# Altium PCB PCBUL.PcbDoc (part 2 of 2)
Units mil, origin at the board's own origin, x right, y up, seen from the top; angles counter-clockwise.
Board outline 2874.31 x 3937.01 mil, 2 copper layers (Top Layer, Bottom Layer); 201 components, 228 nets, 805 pads, 341 vias.
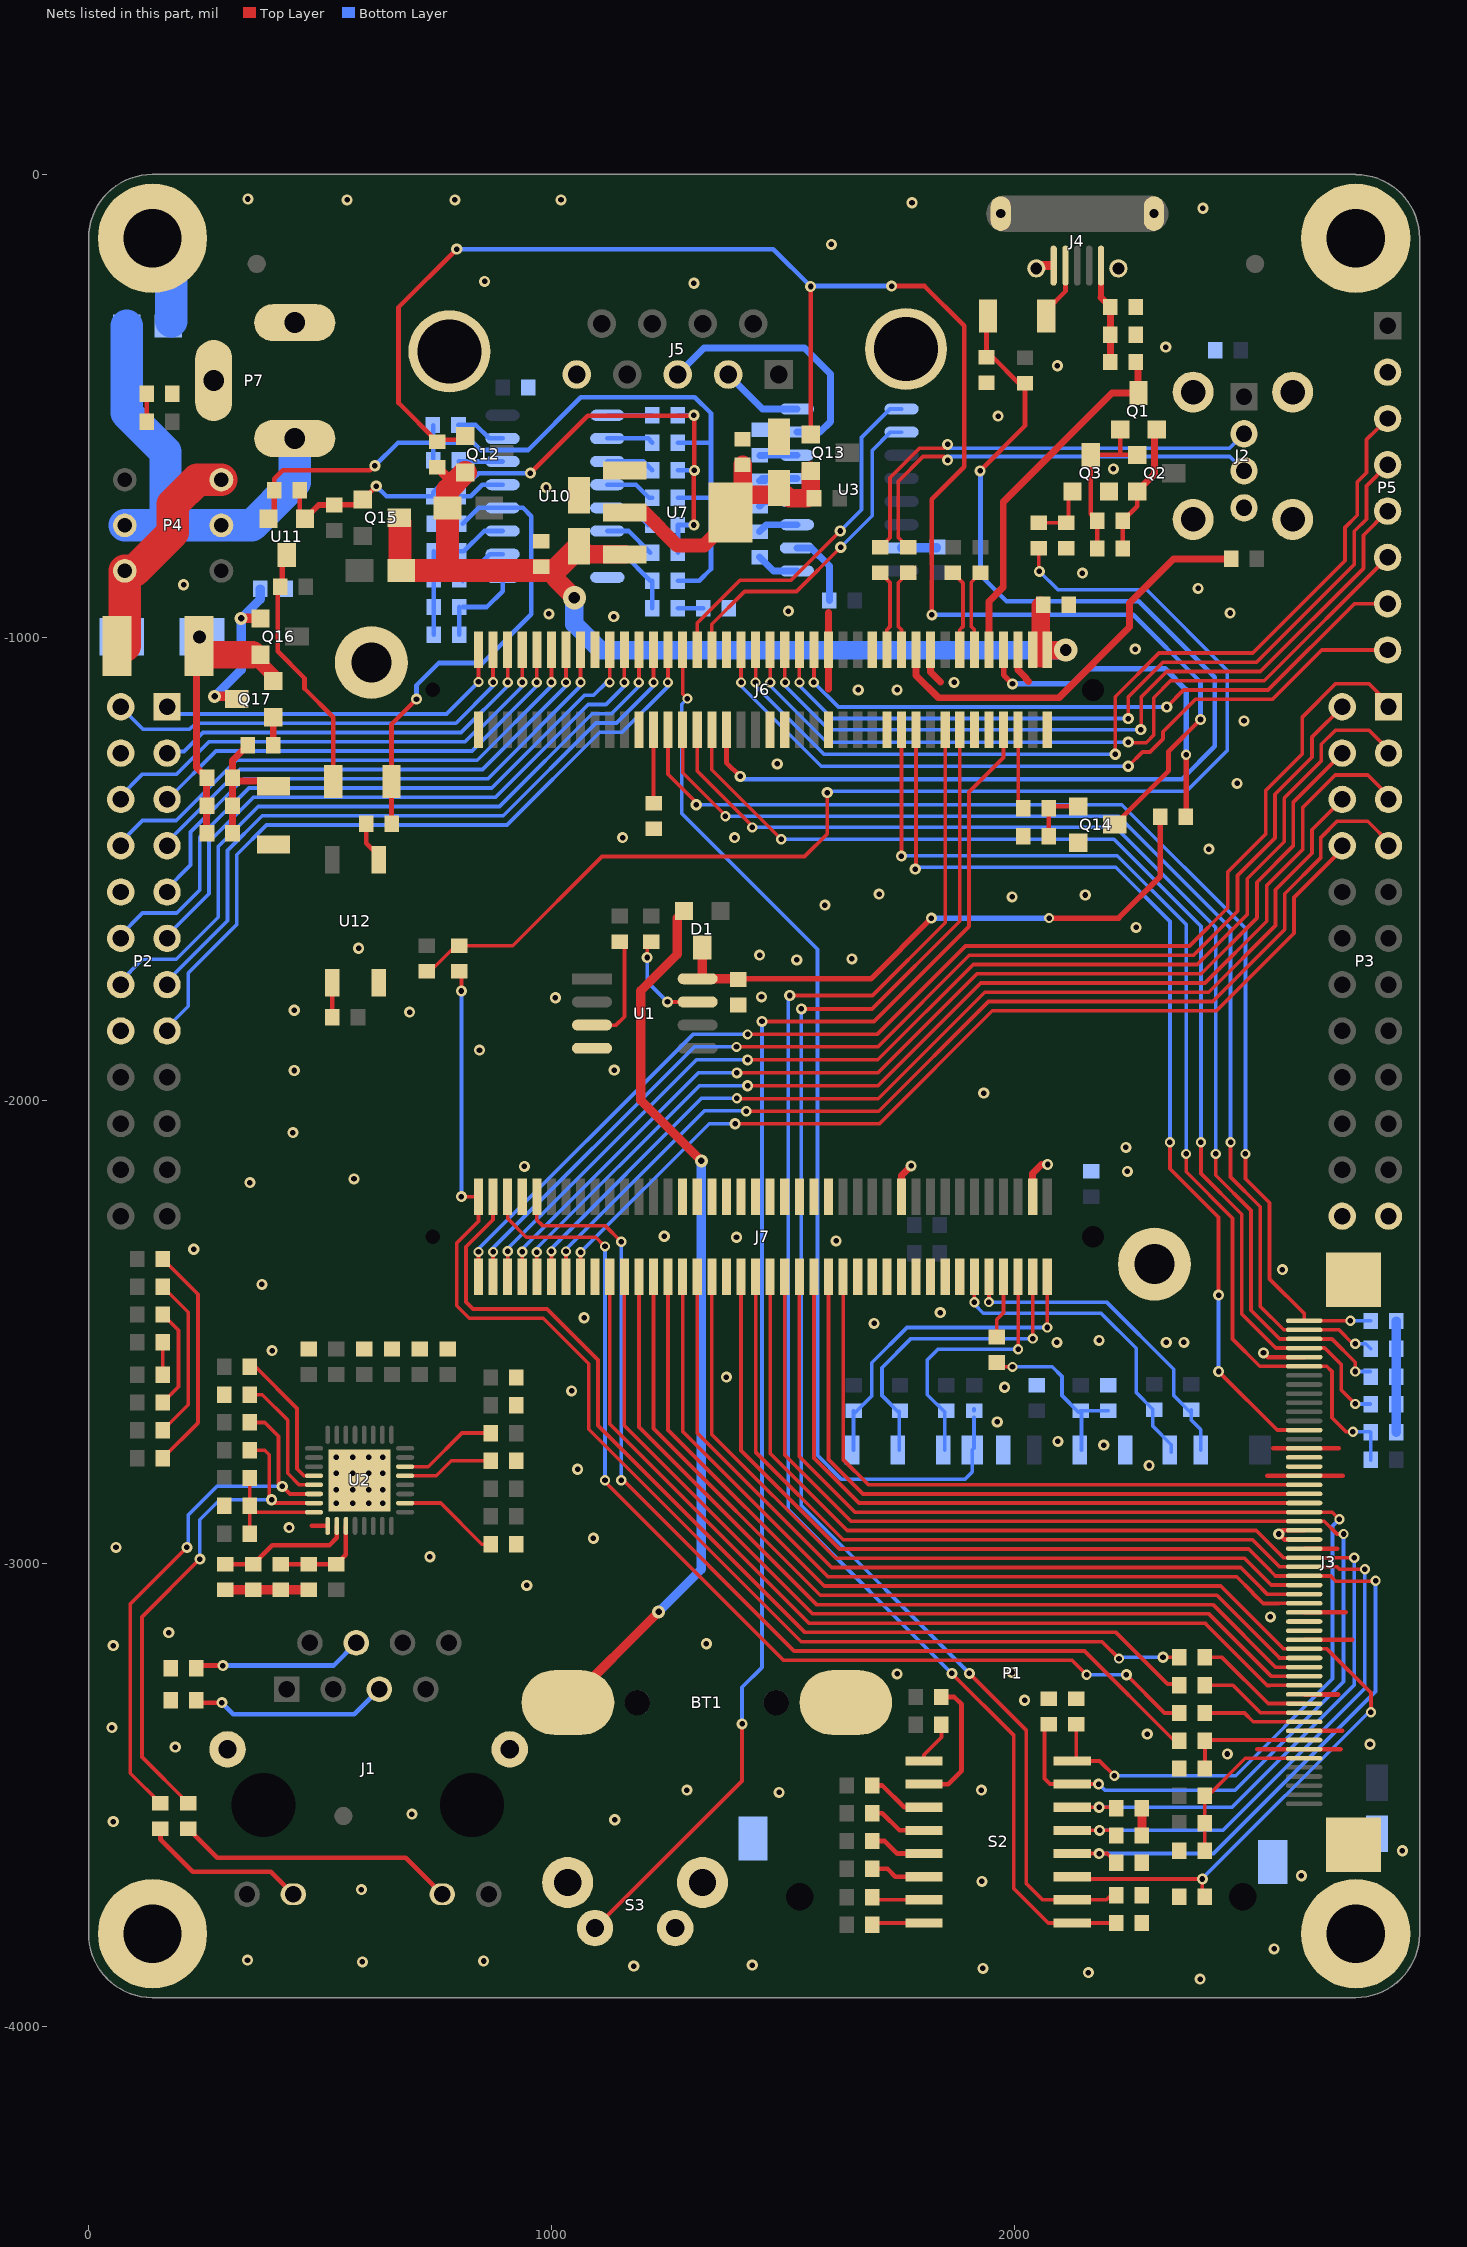
[diagram p2: the nets of this part, all layers, seen from the top]

## Via types
v1: diameter 24, hole 12, Top Layer to Bottom Layer, 235 vias
v2: diameter 22, hole 12, Top Layer to Bottom Layer, 74 vias
v3: diameter 25.98, hole 11.81, Top Layer to Bottom Layer, 16 vias
v4: diameter 50, hole 25, Top Layer to Bottom Layer, 8 vias
v5: diameter 28, hole 14, Top Layer to Bottom Layer, 4 vias
v6: diameter 40, hole 20, Top Layer to Bottom Layer, 2 vias
v7: diameter 30, hole 15, Top Layer to Bottom Layer, 1 vias
v8: diameter 50, hole 28, Top Layer to Bottom Layer, 1 vias

## Nets (pads, with @x,y where several pads share a name; then routed paths per layer and width w, separated by ;. In a path a pad name is that pad's centre, name@x,y a point inside that pad or via, vN(x,y) a via of type N, cw(c..) or ccw(c..) an arc to the next point about the centre after c; other vN are vias at no path point) (continued)
GND: BT1.2 C1.1 C2.1 C3.1 C4.1 C5.1 C6.1 C7.1 C8.2 C9.2 C10.2 C11.1 C12.1 C13.1 C14.1 C15.1 C17.1 C18.1 C19.2 C22.2 C24.2 C25.2 C26.2 C27.2 C28.1 C29.2 C47.2 C49.1 C50.2 C51.2 C59.1 D14.2 D15.1 D16.1 D17.2 H1.0 H2.0 H3.0 H10.1 H11.1 J1.13 J1.14 J2.4 J2.5 J2.6 J2.7 J2.8 J3.5 J3.15 J3.16 J3.17 J3.18 J3.24 J3.25 J3.26 J3.33 J3.34 J3.35 J3.36 J3.42 J3.46 J3.48 J3.55 J3.56 J4.5 J4.6 J4.7 J4.8 J4.9 J5.5 J5.10 J5.11 J6.2 J6.17 J6.24 J6.35 J6.42 J6.49 J6.55 J6.58 J6.63 J6.75 J6.80 J7.7 J7.18 J7.29 J7.36 J7.54 J7.59 J7.77 P1.3 P1.6 P1.12 P1.13 P2.4 P2.10 P2.16 P3.23 P3.24 P5.2 P7.2 P7.3 Q3.2 Q14.2 R7.1 R12.2 R14.1 R17.2 R18.1 R20.2 R21.1 R22.2 R23.1 R26.1 R30.2 R36.1 R51.1 R88.2 R89.2 R92.2 R93.2 R96.1 R97.1 R102.1 R133.2 R142.2 R148.2 R149.2 S3.2 S3.3 S3.4 U1.4 U2.1 U2.33 U3.15 U7.1 U10.8 U12.2 | length 2191.9
  Top Layer w10: 481.57,-2918.43 U2.1@516.1,-2918.43 ; 2523.69,-3400.54 J3.48@2624.91,-3400.54 2703.46,-3400.54 ; v1(2537,-2545) 2546.09,-2554.09 J3.5@2624.91,-2554.09 ; 2544.99,-2809.99 J3.18@2624.91,-2809.99 2708.01,-2809.99 ; 2558.06,-2750.94 J3.15@2624.91,-2750.94 2699.94,-2750.94 ; v1(2570,-2936) 2581.79,-2947.79 J3.25@2624.91,-2947.79 ; v1@2577.9,-2928.1 J3.24@2624.91,-2928.1 ; J3.46@2624.91,-3361.17 2706.83,-3361.17 ; J3.42@2624.91,-3282.43 2698.57,-3282.43 ; J3.36@2624.91,-3164.32 2728.68,-3164.32 ; J3.33@2624.91,-3105.27 2714.73,-3105.27 ; J3.26@2624.91,-2967.47 2696.31,-2967.47
  Top Layer w15: 1597.73,-1111.73 J6.49@1597.73,-1026.39 1597.73,-945.73 ; J7.59@1755.21,-2207.49 1755.21,-2161.79 v1(1776,-2141) ; J6.63@1818.2,-1026.39 1818.2,-1074.2 1840,-1096 ; J6.75@2007.18,-1026.39 2007.18,-1070.46 2024.5,-1087.78 2024.5,-1089.5 2030,-1095 ; J7.77@2038.68,-2207.49 2038.68,-2157.32 2058,-2138
  Top Layer w20: C3.1@295,-3056.56 C4.1@355,-3056.56 C2.1@415,-3056.56 C1.1@475,-3056.56 ; J4.7@2052.32,-196.85 2076,-196.85 ; R89.2@2274.56,-3587 R93.2@2274.56,-3528
  Bottom Layer w20: U3.15@1755.4,-806.4 C22.2@1831.04,-806.4 ; R26.1@2823.96,-2716 C15.1@2823.96,-2656 C14.1@2823.96,-2596 C13.1@2823.96,-2536 C12.1@2823.96,-2476
  other v1: 2400,-3897 2159,-3883 1931,-3874 1177,-3869 1433,-3867 591,-3860 853,-3858 343,-3856 2560,-3832 589,-3704 1929,-3686 2619,-3674 2837,-3620 53,-3557 1136,-3553 698,-3541 1491,-3494 1292,-3489 1928,-3489 2459,-3411 187,-3396 2767,-3390 2286,-3368 50,-3354 2021,-3295 1746,-3238 1994,-3235 53,-3177 1334,-3173 173,-3149 2552,-3115 946,-3047 737,-2985 59,-2965 1090,-2945 433,-2922 1056,-2796 2290,-2788 2192,-2744 2093,-2736 1962,-2694 1043,-2627 1978,-2619 1377,-2597 396,-2540 2091,-2522 2327,-2522 2365,-2522 2182,-2518 1696,-2481 1070,-2469 1839,-2458 374,-2397 2578,-2365 227,-2321 1614,-2303 1399,-2295 1243,-2293 348,-2177 573,-2169 2243,-2153 941,-2142 2071,-2138 2240,-2101 441,-2069 1933,-1984 444,-1935 1135,-1934 844,-1891 693,-1809 444,-1805 1008,-1778 1453,-1776 1529,-1696 1648,-1694 1449,-1686 583,-1671 2262,-1626 1590,-1578 1994,-1560 2152,-1556 1707,-1554 2419,-1457 1153,-1432 1395,-1432 2480,-1315 1487,-1273 2495,-1180 1662,-1113 1746,-1113 1869,-1097 2260,-1025 1134,-955 994,-949 2465,-947 1511,-943 2396,-894 205,-886 2146,-861 988,-676 2213,-636 1964,-522 2092,-413 2326,-373 1307,-235 855,-231 1604,-151 2406,-73 1778,-61 558,-55 791,-55 1020,-55 344,-53
  other v3: 535,-2870 570,-2870 605,-2870 635,-2870 535,-2840 570,-2840 605,-2840 635,-2840 535,-2805 570,-2805 605,-2805 635,-2805 535,-2770 570,-2770 605,-2770 635,-2770
GPIO_1: C15.2 J3.4 J6.34 | length 2546.6
  Top Layer w8: J6.34@1345.76,-1199.61 1345.76,-1285.76 v2(1495.5,-1435.5) ; v2(2402,-2090) 2402,-2157.58 2490,-2245.58 2490,-2461.05 2563.36,-2534.4 J3.4@2624.91,-2534.4 2669.4,-2534.4 2705,-2570 2705,-2625 v2(2735,-2655)
  Bottom Layer w8: v2(1495.5,-1435.5) 2213.92,-1435.5 2402,-1623.58 v2(2402,-2090) ; v2(2735,-2655) C15.2@2767.84,-2655
GPIO_2: C14.2 J3.3 J6.32 | length 2531.7
  Top Layer w8: J6.32@1314.27,-1199.61 1314.27,-1288.27 v2@1434.5,-1408.5 ; v2(2434,-2115) 2434,-2161.29 2510,-2237.29 2510,-2452.76 2571.96,-2514.72 J3.3@2624.91,-2514.72 2684.72,-2514.72 2735,-2565 v2(2735,-2585)
  Bottom Layer w8: v2(1433,-1410) 2218,-1410 2434,-1626 v2(2434,-2115) ; v2(2735,-2585) C14.2@2767.84,-2585
GPIO_3: C13.2 J3.2 J6.30 | length 2528.6
  Top Layer w8: J6.30@1282.77,-1199.61 1282.77,-1291.77 v2@1371.5,-1380.5 ; v2(2466,-2090) 2466,-2165.01 2530,-2229.01 2530,-2444.48 2580.55,-2495.03 J3.2@2624.91,-2495.03 2700.03,-2495.03 2730,-2525 v2(2735,-2525)
  Bottom Layer w8: v2(1375,-1386) 2224,-1386 2466,-1628 v2(2466,-2090) ; v2(2735,-2525) 2757.84,-2525 C13.2@2768.84,-2536
GPIO_4: C12.2 J3.1 J6.28 | length 2521.3
  Top Layer w8: J6.28@1251.28,-1199.61 1251.28,-1295.28 v1@1312,-1356 ; v2(2498,-2115) 2498,-2168.73 2550,-2220.73 2550,-2385 2624.91,-2459.91 J3.1@2624.91,-2475.35 v2(2724.65,-2475.35)
  Bottom Layer w8: v1(1312,-1361) 2231,-1361 2498,-1628 v2(2498,-2115) ; v2(2724.65,-2475.35) C12.2@2768.19,-2475.35
JTAG_MOD: J6.37 P5.8 | length 1659
  Top Layer w8: v2@1408.76,-1096.76 J6.37@1408.76,-1026.39 ; v1(2245,-1278) 2276,-1247 2291.88,-1247 2320,-1218.88 2320,-1203.44 2390,-1133.44 2556.56,-1133.44 2663,-1027 P5.8@2805,-1027
  Bottom Layer w8: v2(1409,-1097) 1409,-1105 1582,-1278 v1(2245,-1278)
JTAG_NTRST: J6.39 P5.3 | length 1970.1
  Top Layer w8: v2@1440.25,-1096.75 J6.39@1440.25,-1026.39 ; v1(2217,-1252) 2217,-1128 2311.56,-1033.44 2513.71,-1033.44 2713,-834.15 2713,-762.43 2739.36,-736.07 2739.36,-664.36 2759.36,-644.36 2759.36,-572.64 2782,-550
  Bottom Layer w8: v2(1440,-1097) 1440,-1104 1588,-1252 v1(2217,-1252)
JTAG_TCK: J6.41 P5.6 | length 1674.3
  Top Layer w8: v2@1471.75,-1096.75 J6.41@1471.75,-1026.39 ; v1(2245,-1226) 2246,-1227 2283.6,-1227 2300,-1210.6 2300,-1129.85 2336.41,-1093.44 2538.56,-1093.44 P5.6@2805,-827
  Bottom Layer w8: v2(1472,-1097) 1472,-1104 1594,-1226 v1(2245,-1226)
JTAG_TDI: J6.45 P5.4 | length 1715.6
  Top Layer w8: J6.45@1534.74,-1026.39 1534.74,-1096.74 v2(1535,-1097) ; v1(2245,-1175) 2245,-1128.28 2319.84,-1053.44 2521.99,-1053.44 2733,-842.43 2733,-770.72 2759.36,-744.36 2759.36,-672.64 P5.4@2805,-627
  Bottom Layer w8: v2(1535,-1097) 1535,-1104.18 1605.82,-1175 v1(2245,-1175)
JTAG_TDO: J6.47 P5.7 | length 1424
  Top Layer w8: v2(1566,-1097) 1566.24,-1096.76 J6.47@1566.24,-1026.39 ; v1(2328,-1150) 2364.56,-1113.44 2546.84,-1113.44 2733.28,-927 P5.7@2805,-927
  Bottom Layer w8: v2(1566,-1097) 1619,-1150 v1(2328,-1150)
JTAG_TMS: J6.43 P5.5 | length 1695.5
  Top Layer w8: v2@1503.24,-1096.24 J6.43@1503.24,-1026.39 ; v1(2272,-1199) 2273,-1198 2273,-1128.57 2328.13,-1073.44 2530.27,-1073.44 2753,-850.72 2753,-779 P5.5@2805,-727
  Bottom Layer w8: v2(1504,-1097) 1504,-1104.18 1598.82,-1199 v1(2272,-1199)
LCD_DATA0: J3.19 J7.52 | length 1412.6
  Top Layer w8: J7.52@1629.23,-2380.72 1629.23,-2775 1683.91,-2829.68 J3.19@2624.91,-2829.68
LCD_DATA1: J3.20 J7.50 | length 1452.3
  Top Layer w8: J7.50@1597.73,-2380.72 1597.73,-2775 1672.09,-2849.36 J3.20@2624.91,-2849.36
LCD_DATA2: J3.21 J7.48 | length 1490
  Top Layer w8: J7.48@1566.24,-2380.72 1566.24,-2771.79 1663.5,-2869.05 J3.21@2624.91,-2869.05
LCD_DATA3: J3.22 J7.46 R88.1 S2.16 | length 2695.1
  Top Layer w8: J7.46@1534.74,-2380.72 1534.74,-2768.58 1654.9,-2888.73 J3.22@2624.91,-2888.73 2685.73,-2888.73 v2(2701,-2904) ; R88.1@2133,-3346.56 2133,-3425 2132,-3426 2183,-3426 v2(2215,-3458)
  Bottom Layer w8: v2(2215,-3458) 2477,-3458 2686.27,-3248.73 2686.27,-2918.73 v2(2701,-2904)
LCD_DATA4: J3.23 J7.44 R92.1 S2.15 | length 2855.5
  Top Layer w8: J7.44@1503.24,-2380.72 1503.24,-2765.36 1646.3,-2908.42 J3.23@2624.91,-2908.42 2668,-2908.42 2695.58,-2936 v2(2710,-2936) ; R92.1@2073,-3346.56 2064,-3355.56 2064,-3464 2076,-3476 S2.15@2124,-3476 v1(2181,-3476)
  Bottom Layer w8: v1(2181,-3476) 2194,-3489 2476,-3489 2710,-3255 v2(2710,-2936)
LCD_DATA5: J3.27 J7.42 R93.1 S2.14 | length 2766.7
  Top Layer w8: J7.42@1471.75,-2380.72 1471.75,-2762.15 1638.01,-2928.42 2521.57,-2928.42 2580.31,-2987.16 J3.27@2624.91,-2987.16 v2(2733,-2987.16) ; S2.14@2124,-3526 v1(2182,-3526) R93.1@2217.44,-3526
  Bottom Layer w8: v1(2182,-3526) 2469,-3526 2733,-3262 v2@2733,-2985
LCD_DATA6: J3.28 J7.40 R89.1 S2.13 | length 2855.8
  Top Layer w8: J7.40@1440.25,-2380.72 1440.25,-2758.94 1629.73,-2948.42 2513.29,-2948.42 2571.4,-3006.53 ; S2.13@2124,-3576 v1(2183,-3576) 2208.44,-3576 R89.1@2219.44,-3587 ; 2571.4,-3006.84 J3.28@2624.91,-3006.84 2695.84,-3006.84 2701,-3012 v2(2756,-3012)
  Bottom Layer w8: v1(2183,-3576) 2449,-3576 2756,-3269 v2(2756,-3012)
LCD_DATA7: J3.29 J7.38 R149.1 S2.12 | length 2949.3
  Top Layer w8: J7.38@1408.76,-2380.72 1408.76,-2755.73 1621.44,-2968.42 2505.01,-2968.42 2551.4,-3014.81 2551.4,-3015.13 2562.49,-3026.21 ; S2.12@2124,-3626 v1(2182,-3626) 2199.44,-3626 R149.1@2219.44,-3646 ; 2562.49,-3026.53 J3.29@2624.91,-3026.53 2681.53,-3026.53 2693,-3038 2778,-3038 v2(2779,-3037)
  Bottom Layer w8: v1(2182,-3626) 2429,-3626 2779,-3276 v2@2779,-3035
LCD_DATA8: J3.30 J7.34 | length 1754
  Top Layer w8: J7.34@1345.76,-2380.72 1345.76,-2721.02 1613.16,-2988.42 2496.09,-2988.42 2553.57,-3045.9 ; 2553.57,-3046.21 J3.30@2624.91,-3046.21
LCD_DATA9: J3.31 J7.32 | length 1792
  Top Layer w8: J7.32@1314.27,-2380.72 1314.27,-2717.81 1604.88,-3008.42 2487.81,-3008.42 2533.57,-3054.18 2533.57,-3054.5 2544.66,-3065.58 ; 2544.66,-3065.9 J3.31@2624.91,-3065.9
LCD_DATA10: J3.32 J7.30 | length 1830.2
  Top Layer w8: J7.30@1282.77,-2380.72 1282.77,-2714.6 1596.59,-3028.42 2479.52,-3028.42 2513.57,-3062.47 2513.57,-3063.1 2536.37,-3085.9 2570,-3085.9 ; 2570,-3085.58 J3.32@2624.91,-3085.58
LCD_DATA11: J3.37 J7.28 R148.1 S2.11 | length 2983.8
  Top Layer w8: J7.28@1251.28,-2380.72 1251.28,-2711.39 1588.31,-3048.42 2444.96,-3048.42 2580.24,-3183.69 ; S2.11@2124,-3676 2129,-3681 v1(2405,-3681) R148.1@2405,-3720.44 ; S2.11@2129,-3676 S2.11@2153,-3676 ; 2580.24,-3184.01 J3.37@2624.91,-3184.01 2674.01,-3184.01 2769,-3279 v2(2769,-3321)
  Bottom Layer w8: v1@2404.5,-3680.5 v2@2766.5,-3318.5
LCD_DATA12: J3.38 J7.26 | length 1937.7
  Top Layer w8: J7.26@1219.78,-2380.72 1219.78,-2708.17 1580.02,-3068.42 2436.36,-3068.42 2571.33,-3203.38 ; 2571.33,-3203.69 J3.38@2624.91,-3203.69
LCD_DATA13: J3.39 J7.24 | length 1975.5
  Top Layer w8: J7.24@1188.28,-2380.72 1188.28,-2704.96 1571.74,-3088.42 2427.77,-3088.42 2562.41,-3223.06 ; 2562.41,-3223.38 J3.39@2624.91,-3223.38
LCD_DATA14: J3.40 J7.22 | length 2013.2
  Top Layer w8: J7.22@1156.79,-2380.72 1156.79,-2701.75 1563.45,-3108.42 2419.17,-3108.42 2553.5,-3242.75 ; 2553.5,-3243.06 J3.40@2624.91,-3243.06
LCD_DATA15: J3.41 J7.20 | length 2051.5
  Top Layer w8: J7.20@1125.29,-2380.72 1125.29,-2698.54 1555.17,-3128.42 2410.88,-3128.42 2411.83,-3129.36 2411.83,-3129.68 2545.21,-3263.06 2550,-3263.06 ; 2550,-3262.75 J3.41@2624.91,-3262.75
LCD_DATA16: J7.16 P3.8 | length 2115.4
  Top Layer w8: J7.16@1062.3,-2380.72 v2(1062.3,-2327.7) ; v1(1396,-2050) 1707.58,-2050 1951.52,-1806.06 2435.52,-1806.06 2603,-1638.58 2603,-1561.42 2708.65,-1455.76 P3.8@2708.65,-1446.06
  Bottom Layer w8: v2(1062.3,-2327.7) 1340,-2050 v1(1396,-2050)
LCD_DATA17: J7.14 P3.7 | length 2315.5
  Top Layer w8: J7.14@1030.8,-2380.72 v2(1030.8,-2325.8) ; v2(1420,-2023) 1706.29,-2023 1943.23,-1786.06 2427.23,-1786.06 2583,-1630.29 2583,-1553.13 2661,-1475.13 2661,-1431.7 2695.7,-1397 2761.96,-1397 P3.7@2811.02,-1446.06
  Bottom Layer w8: v2(1030.8,-2325.8) 1030.8,-2321.01 1329.82,-2022 v2@1420,-2022 ; v2@1419,-2022 v2(1420,-2023)
LCD_DATA18: J7.12 P3.6 | length 2253.1
  Top Layer w8: J7.12@999.31,-2380.72 v2(999.31,-2325.69) ; v2@1400,-1996 1705.01,-1996 1934.95,-1766.06 2418.95,-1766.06 2563,-1622.01 2563,-1544.85 2642,-1465.85 2642,-1415.09 P3.6@2711.02,-1346.06 ; v2(1400,-1995) v2@1401,-1996
  Bottom Layer w8: v2(999.31,-2325.69) 999.31,-2319.12 1323.42,-1995 v2(1400,-1995)
LCD_DATA19: J7.10 P3.5 | length 2446.8
  Top Layer w8: J7.10@967.81,-2380.72 v2(967.81,-2327.19) ; v1(1423,-1968) 1704.73,-1968 1926.66,-1746.06 2410.66,-1746.06 2544,-1612.73 2544,-1535.56 2622,-1457.56 2622,-1367 2692,-1297 2761.96,-1297 P3.5@2811.02,-1346.06
  Bottom Layer w8: v2(967.81,-2327.19) 967.81,-2319.01 1318.82,-1968 v1(1423,-1968)
LCD_DATA20: J7.8 P3.4 | length 2380.3
  Top Layer w8: J7.8@936.32,-2380.72 v2(936.32,-2326.32) ; v1(1400,-1940) 1704.44,-1940 1918.38,-1726.06 2402.38,-1726.06 2523,-1605.44 2523,-1528.28 2601,-1450.28 2601,-1356.09 P3.4@2711.02,-1246.06
  Bottom Layer w8: v2(936.32,-2326.32) 936.32,-2320.5 1316.82,-1940 v1(1400,-1940)
LCD_DATA21: J7.6 P3.3 | length 2571.2
  Top Layer w8: J7.6@904.82,-2380.72 v2(904.82,-2325.18) ; v1(1423,-1912) 1704.16,-1912 1910.09,-1706.06 2394.1,-1706.06 2502,-1598.16 2502,-1521 2582,-1441 2582,-1346.8 2662,-1266.8 2662,-1230.7 2692.17,-1200.54 2765.5,-1200.54 P3.3@2811.02,-1246.06
  Bottom Layer w8: v2(904.82,-2325.18) 904.82,-2319.63 1312.45,-1912 v1(1423,-1912)
LCD_DATA22: J7.4 P3.2 | length 2516.1
  Top Layer w8: J7.4@873.32,-2380.72 v2(873.32,-2326.68) v2@875,-2325 ; v2(1399,-1884) 1703.87,-1884 1901.81,-1686.06 2385.81,-1686.06 2481,-1590.87 2481,-1513.71 2562,-1432.71 2562,-1338.52 2642,-1258.52 2642,-1215.09 P3.2@2711.02,-1146.06
  Bottom Layer w8: v2@875,-2325 v2(873.32,-2326.68) 873.32,-2318.49 1307.82,-1884 v2(1399,-1884)
LCD_DATA23: J7.2 P3.1 | length 2701.3
  Top Layer w8: J7.2@841.83,-2380.72 v2(841.83,-2326.83) ; v2(1423,-1857) 1702.59,-1857 1893.53,-1666.06 2377.53,-1666.06 2460,-1583.59 2460,-1506.43 2542,-1424.43 2542,-1330.23 2621,-1251.23 2621,-1171.7 2692.7,-1100 2764.96,-1100 P3.1@2811.02,-1146.06
  Bottom Layer w8: v2(841.83,-2326.83) 841.83,-2319.99 1304.82,-1857 v2(1423,-1857)
LCD_DE: J7.5 R47.1 | length 2237.8
  Top Layer w8: J7.5@904.82,-2207.49 904.82,-2254.82 945,-2295 1095,-2295 v2(1115,-2315) ; v2(1115,-2820) 1115,-2823.18 1500.23,-3208.42 2123.42,-3208.42 v2(2155,-3240) ; v1(2241,-3240) 2323.4,-3322.4 R47.1@2355.44,-3322.4
  Bottom Layer w8: v2(1115,-2820) v2(1115,-2315) ; v2(2155,-3240) v1(2241,-3240)
LCD_HSYNC: J7.1 R45.1 R103.2 | length 2743.4
  Top Layer w8: R103.2@800,-1720.88 805,-1725.88 v1(805,-1763.32) ; v1(805,-2207.49) J7.1@841.83,-2207.49 841.83,-2260.36 794.83,-2307.36 794.83,-2443.11 821.72,-2470 981.72,-2470 1080,-2568.28 1080,-2709.81 1538.6,-3168.42 2188.42,-3168.42 v2(2225,-3205) ; v1(2320,-3202) R45.1@2355.04,-3202
  Bottom Layer w8: v1(805,-2207.49) v1(805,-1763.32) ; v2@2220,-3210 v2(2225,-3205) ; v2@2228,-3202 v1(2320,-3202)
LCD_NPWREN: J3.6 J6.60 R25.2 R26.2 | length 2384.7
  Top Layer w8: v1(1755.21,-1472) J6.60@1755.21,-1199.61 ; v2(2370,-2115) 2370,-2153.86 2470,-2253.86 2470,-2515 2528.77,-2573.77 J3.6@2624.91,-2573.77 2673.77,-2573.77 2685,-2585 2685,-2685 2715,-2715 v2(2730,-2715)
  Bottom Layer w8: v1@1755.14,-1471.14 2221.28,-1471.14 2370,-1619.86 v2(2370,-2115) ; v2(2730,-2715) R26.2@2767.84,-2715 ; R25.2@2768.84,-2776 R26.2@2768.84,-2716
LCD_PCLK: J7.9 R48.1 | length 2205.5
  Top Layer w8: J7.9@967.81,-2207.49 967.81,-2257.81 980,-2270 1115,-2270 v2(1150,-2305) ; v2(1150,-2820) 1155,-2820 1523.42,-3188.42 2150.42,-3188.42 2344.4,-3382.4 R48.1@2355.44,-3382.4
  Bottom Layer w8: v2(1150,-2820) v2(1150,-2305)
LCD_VSYNC: J7.3 R46.1 | length 2214.5
  Top Layer w8: J7.3@873.32,-2207.49 873.32,-2257.15 814.83,-2315.64 814.83,-2389.02 815,-2389.19 815,-2435 830,-2450 990,-2450 1100,-2560 1100,-2701.53 1546.89,-3148.42 2218.42,-3148.42 2330,-3260 R46.1@2353.04,-3260
LED0_LINK: R6.2 R10.1 U2.30 | length 1199.1
  Top Layer w8: R10.1@155,-3517.44 90,-3452.44 90,-3087 v1(212,-2965) ; R6.2@347.56,-2695 380,-2695 410,-2725 410,-2826 417,-2833 v1(418,-2833) 434.53,-2849.53 U2.30@486.57,-2849.53
  Bottom Layer w8: v1(212,-2965) 215,-2962 215,-2895 277,-2833 v1(418,-2833) v1@423,-2838
LED1_SPEED: R5.2 R11.1 U2.31 | length 1118.7
  Top Layer w8: R11.1@215,-3517.44 115,-3417.44 115,-3115 v1(240,-2990) ; R5.2@347.56,-2755 380,-2755 390,-2765 390,-2857 v1(395,-2862) 402.21,-2869.21 U2.31@486.57,-2869.21
  Bottom Layer w8: v1(240,-2990) 240,-2905 283,-2862 v1(395,-2862)
MODE0: J6.68 R97.2 S2.10 | length 3141.2
  Top Layer w8: v1(1539,-1802) 1691.88,-1802 1881.2,-1612.69 J6.68@1881.2,-1199.61 ; v1(1902,-3237) 2025,-3360 2025,-3691 2060,-3726 S2.10@2124,-3726 2198,-3726 R97.2@2219,-3705
  Bottom Layer w8: v1(1539,-1802) 1539,-2874 v1(1902,-3237)
MODE1: J6.66 R96.2 S2.9 | length 3205.2
  Top Layer w8: v1(1514,-1773) 1692.6,-1773 1849.7,-1615.9 J6.66@1849.7,-1199.61 ; v1(1864,-3237) 1998,-3371 1998,-3702 2072,-3776 S2.9@2124,-3776 2208,-3776 R96.2@2219,-3765
  Bottom Layer w8: v1(1514,-1773) 1511,-1776 1511,-2884 v1(1864,-3237)
MX6_POR_B: J6.74 S3.1 | length 3101.6
  Top Layer w8: S3.1@1093.39,-3786.89 1411,-3469.28 v1(1411,-3346) ; v1@1449,-1829 v1(1454,-1829) 1696,-1829 1901.2,-1623.8 1901.2,-1333.49 1975.68,-1259 J6.74@1975.68,-1199.61
  Bottom Layer w8: v1(1411,-3346) 1411,-3267 1454,-3224 1454,-1834 v1@1449,-1829
NAND_ALE: J7.60
NAND_CLE: J7.62
NAND_DATA0: J7.45
NAND_DATA1: J7.43
NAND_DATA2: J7.41
NAND_DATA3: J7.39
NAND_DATA4: J7.37
NAND_DATA5: J7.35
NAND_DATA6: J7.33
NAND_DATA7: J7.31
NAND_DQS: J7.56
NAND_NCE0: J7.66
NAND_NCE1: J7.64
NAND_NRE: J7.49
NAND_NREADY: J7.68
NAND_NWE: J7.47
NAND_NWP: J7.58
NetBT1_1: BT1.1 D1.2 | length 1921.5
  Top Layer w20: BT1.1@1035,-3300 v5(1231,-3104) ; D1.2@1285.63,-1590.82 1271,-1605.45 1271,-1684 1192,-1763 1192,-1999 v5(1323,-2130)
  Bottom Layer w20: v5(1231,-3104) 1323,-3012 v5(1323,-2130)
NetC1_2: C1.2 C2.2 FB1.1 U2.3 | length 211.5
  Top Layer w10: C2.2@415,-3001.44 C1.2@475,-3001.44 FB1.1@535,-3001.44 555.47,-2980.97 U2.3@555.47,-2918.43
NetC3_2: C3.2 C4.2 U2.2 | length 290.3
  Top Layer w10: C3.2@295,-3001.44 C4.2@355,-3001.44 396.44,-2960 520,-2960 535.79,-2944.21 U2.2@535.79,-2918.43
NetC5_2: C5.2 R2.2 R4.2 U2.32 | length 264.8
  Top Layer w8: R4.2@347.56,-2935 C5.2@347.56,-2875 ; R2.2@347.56,-2815 C5.2@347.56,-2875 ; U2.32@486.57,-2888.9 361.46,-2888.9 C5.2@347.56,-2875
NetC6_2: C6.2 J1.4 | length 368
  Top Layer w10: C6.2@232.56,-3226 238.56,-3220 v1(290,-3220)
  Bottom Layer w10: v1(290,-3220) 528.91,-3220 J1.4@577.83,-3171.09
NetC7_2: C7.2 J1.5 | length 430
  Top Layer w10: C7.2@232.56,-3295 237.56,-3300 v1(287.56,-3300)
  Bottom Layer w10: v1(287.56,-3300) 312.56,-3325 573.91,-3325 J1.5@627.83,-3271.09
NetC16_1: C16.1 Q1.2 Q2.2 R31.2 | length 287.5
  Top Layer w10: C16.1@2232.97,-807.8 R31.2@2232.97,-747.8 2264.26,-716.51 Q2.2@2264.26,-684.37
  Top Layer w15: Q2.2@2264.26,-684.37 2301.91,-646.72 2301.91,-555.2 Q1.2@2306.37,-550.74
NetC16_2: C16.2 Q1.1 Q2.1 Q3.3 R31.1 | length 361.7
  Top Layer w10: Q3.3@2164,-606 2164,-733.95 R31.1@2177.85,-747.8 C16.2@2177.85,-807.8 ; Q3.3@2164.37,-605.63 Q2.1@2264.26,-605.63 ; 2227.63,-605 Q1.1@2227.63,-550.74
NetC17_2: C17.2 C18.2 J4.1 R33.2 | length 216.5
  Top Layer w12: 2186.18,-265.9 J4.1@2186.18,-196.85
  Top Layer w15: 2186.18,-265.9 C18.2@2206.43,-286.15 C17.2@2206.43,-346.15 R33.2@2206.44,-405
NetC20_1: C20.1 U3.1 | length 92.8
  Bottom Layer w15: C20.1@1449,-826.56 1478.84,-856.4 U3.1@1529.4,-856.4
NetC20_2: C20.2 U3.3 | length 86.6
  Bottom Layer w15: C20.2@1449,-771.44 1464.04,-756.4 U3.3@1529.4,-756.4
NetC21_2: C21.2 U3.2 | length 160.8
  Bottom Layer w15: U3.2@1529.4,-806.4 1560.4,-806.4 1599.44,-845.44 C21.2@1599.44,-920
NetC23_1: C23.1 U3.4 | length 84.6
  Bottom Layer w15: C23.1@1449,-716.56 1459.16,-706.4 U3.4@1529.4,-706.4
NetC23_2: C23.2 U3.5 | length 86.9
  Bottom Layer w15: C23.2@1449,-661.44 C23.2@1460.56,-661.44 ; C23.2@1454.04,-656.4 U3.5@1529.4,-656.4
NetC24_1: C24.1 U3.6 | length 90.5
  Bottom Layer w15: C24.1@1449.16,-606.56 C24.1@1459.44,-606.56 ; C24.1@1449.16,-606.4 U3.6@1529.4,-606.4
NetC26_1: C26.1 J3.47 R48.2 | length 279.2
  Top Layer w8: C26.1@2410.56,-3442.4 R48.2@2410.56,-3382.4 R48.2@2414.02,-3385.86 ; R48.2@2410.56,-3380.86 J3.47@2624.91,-3380.86
NetC60_1: C60.1 C61.1 U10.9 | length 190.1
  Bottom Layer w10: C61.1@800,-994 C60.1@800,-934 ; C60.1@808,-934 860,-934 894,-900 U10.9@894,-870
NetC60_2: C60.2 C61.2 R129.2 R131.2 | length 180
  Bottom Layer w10: C61.2@744.88,-994 C60.2@744.88,-934 R131.2@744.88,-874 R129.2@744.88,-814
NetD2_2: D2.2 J4.4 | length 126.3
  Top Layer w10: D2.2@2067.99,-306 2067.99,-294.01 2109.41,-252.59 J4.4@2109.41,-196.85
NetD4_1: D4.1 R60.1 | length 70
  Top Layer w8: R60.1@160,-2592 D4.1@160,-2522
NetD5_1: D5.1 R61.1 | length 218.2
  Top Layer w8: R61.1@160,-2652 194,-2618 194,-2496 D5.1@160,-2462
NetD6_1: D6.1 R62.1 | length 355.6
  Top Layer w8: R62.1@160,-2712 215,-2657 215,-2457 D6.1@160,-2402
NetD7_1: D7.1 R118.1 U11.3 | length 525.5
  Top Layer w10: R118.1@413.44,-890 408,-895.44 408,-1030 466,-1088 466,-1110 528.01,-1172.01 D7.1@528.01,-1311
  Top Layer w12: R118.1@418,-885.56 U11.3@418,-833
NetD7_2: D7.2 R133.1 R135.2 U10.12 | length 1013.7
  Top Layer w10: R135.2@653.99,-1401.43 D7.2@653.99,-1311 653.99,-1187.01 v1(708,-1133)
  Bottom Layer w10: v1(708,-1133) 708,-1103 756,-1055 851,-1055 956,-950 956,-738 938,-720 U10.12@894,-720 842,-720 R133.1@808,-754
NetD8_1: D8.1 R63.1 | length 493
  Top Layer w8: R63.1@160,-2772 236,-2696 236,-2418 D8.1@160,-2342
NetD14_1: D14.1 R134.1 | length 54.9
  Bottom Layer w10: R134.1@1272.56,-937 D14.1@1327.44,-937
NetD15_2: D15.2 R137.2 R138.2 R139.2 R141.2 | length 276.1
  Top Layer w15: R139.2@309.56,-1425 R139.2@309.56,-1423 ; R137.2@309.57,-1310 R137.2@310.56,-1310 ; R139.2@310.56,-1423 R138.2@310.56,-1363 R137.2@310.56,-1310 ; R141.2@343.44,-1233 310.56,-1265.88 R137.2@310.56,-1303 R137.2@310.56,-1310 ; D15.2@380,-1310 R137.2@310.56,-1310
NetD16_2: D16.2 F1.2 Q16.2 Q17.2 R137.1 R138.1 R139.1 | length 533.9
  Top Layer w15: F1.2@233,-1062.32 233,-1280.56 R137.1@255.44,-1303 ; R139.1@254.44,-1425 R137.1@254.44,-1305
  Top Layer w30: Q16.2@358,-1042 398.74,-1082.74 Q17.2@398.74,-1093.63
  Top Layer w60: F1.2@257.95,-1037.37 Q16.2@353.37,-1037.37
  other v8: 239,-999
NetD17_1: D17.1 R140.1 | length 60
  Top Layer w10: R140.1@125.44,-534 D17.1@125.44,-474
NetF1_1: F1.1 P4.3 P4.6 | length 487.8
  Top Layer w70: F1.1@77.99,-1018 P4.3@77.99,-856.1 98.9,-856.1 182,-773 182,-712 234.75,-659.25 P4.6@286.65,-659.25
NetH3_1: H4.0 R95.1 | length 155
  Bottom Layer w70: R95.1@178,-317 H4.0@178,-162
NetJ1_10: J1.10 R10.2 | length 358.7
  Top Layer w10: R10.2@155,-3572.56 155,-3595 225,-3665 393,-3665 J1.10@442,-3714
NetJ1_11: J1.11 R11.2 | length 607.2
  Top Layer w10: R11.2@215,-3572.56 277.44,-3635 684.65,-3635 J1.11@763.65,-3714
NetJ3_43: J3.43 R45.2 | length 255.7
  Top Layer w8: R45.2@2410.56,-3202.4 2447.4,-3202.4 2547.12,-3302.12 J3.43@2624.91,-3302.12
NetJ3_44: J3.44 R46.2 | length 245.6
  Top Layer w8: R46.2@2408.58,-3260.42 2406.6,-3262.4 R46.2@2410.56,-3262.4 2470.91,-3262.4 2530,-3321.49 ; 2530,-3321.8 J3.44@2624.91,-3321.8
NetJ3_45: J3.45 R47.2 | length 222.3
  Top Layer w8: R47.2@2410.56,-3322.4 2495.91,-3322.4 2515,-3341.49 J3.45@2624.91,-3341.49
NetJ3_49: J3.49 R49.2 R50.2 R51.2 | length 367.9
  Top Layer w8: R51.2@2410,-3620 2410,-3560 2410,-3500 2418,-3500 2497.77,-3420.23 J3.49@2624.91,-3420.23
NetJ7_74: J7.74 R54.1 | length 135.8
  Top Layer w8: R54.1@1961,-2510.44 1961,-2473 1975.68,-2458.32 J7.74@1975.68,-2380.72
NetQ3_1: Q3.1 R29.1 R30.1 | length 131.8
  Top Layer w8: R29.1@2052,-751.88 R30.1@2111,-751.88 2116,-746.88 2116,-693.37 Q3.1@2124.63,-684.74
NetQ14_1: Q14.1 R101.1 R102.2 | length 123.7
  Top Layer w10: R102.2@2073.12,-1429 R101.1@2073.12,-1369 ; R101.1@2077.49,-1369 2077.49,-1364.63 Q14.1@2136.82,-1364.63
NetQ15_1: Q15.1 R112.1 R115.2 R119.1 R121.1 R125.2 R126.1 R128.1 U11.1 | length 1404.5
  Top Layer w10: U11.1@455.56,-731.45 R115.2@455.56,-682 ; Q15.1@591.92,-702 v1(621,-672.92) ; v1(954,-645) 1078,-521 1308,-521 v1(1308,-639) ; v1(1307,-757) v1@1307,-640
  Top Layer w12: U11.1@467.37,-743.26 496.82,-713.81 R119.1@530.66,-713.81 ; R119.1@530.66,-713.26 580.66,-713.26 Q15.1@591.92,-702
  Bottom Layer w10: v1(621,-672.92) 643.08,-695 R125.2@744.44,-695 744.44,-686.56 775,-656 831,-656 842,-645 v1(954,-645) ; R128.1@1272.56,-817 R126.1@1272.56,-757 v1(1307,-757) ; R121.1@1272.56,-639 v1(1308,-639) ; R112.1@1272.56,-520 v1(1307,-520)
NetQ16_1: Q16.1 Q17.3 R142.1 | length 365.2
  Top Layer w20: v5(272,-1127) 314,-1127 Q17.3@320,-1133 ; v5(329.37,-958.63) Q16.1@371.26,-958.63
  Bottom Layer w20: v5(272,-1127) 329.37,-1069.63 v5(329.37,-958.63) 370.44,-917.56 R142.1@370.44,-895
NetQ17_1: Q17.1 R141.1 | length 60.4
  Top Layer w15: R141.1@398.56,-1233 Q17.1@398.56,-1172.55
NetR1_2: R1.2 U1.7 | length 217.6
  Top Layer w8: v1(1206,-1691) 1206,-1665.56 R1.2@1215,-1656.56 ; v1(1250,-1787) U1.7@1315.17,-1787
  Bottom Layer w8: v1(1206,-1691) 1206,-1743 v1(1250,-1787)
NetR3_2: R3.2 U1.3 | length 244.2
  Top Layer w8: U1.3@1086.83,-1837 1139,-1837 1157,-1819 1157,-1666.56 R3.2@1147,-1656.56
NetR7_2: R7.2 U2.29 | length 287.1
  Top Layer w8: R7.2@347.56,-2635 375,-2635 430,-2690 430,-2805 454.84,-2829.84 U2.29@486.57,-2829.84
NetR8_2: R8.2 U2.28 | length 312.6
  Top Layer w8: R8.2@347.56,-2575 360,-2575 450,-2665 450,-2795 465.16,-2810.16 U2.28@486.57,-2810.16
NetR12_1: R12.1 U2.10 | length 221.8
  Top Layer w8: U2.10@683.43,-2869.21 760.21,-2869.21 849,-2958 R12.1@868.44,-2958
NetR17_1: R17.1 U2.13 | length 198.3
  Top Layer w8: U2.13@683.43,-2810.16 750.84,-2810.16 783,-2778 R17.1@868.44,-2778
NetR19_1: R19.1 U2.14 | length 231.3
  Top Layer w8: U2.14@683.43,-2790.47 733.53,-2790.47 806,-2718 R19.1@868.44,-2718 R19.1@856.97,-2729.47
NetR98_2: R98.2 S2.7 | length 142.9
  Top Layer w8: R98.2@1692.56,-3720 1698.56,-3726 S2.7@1804,-3726 S2.7@1833,-3726
NetR99_2: R99.2 S2.5 | length 151.6
  Top Layer w10: R99.2@1692.56,-3599 1719,-3599 1746,-3626 S2.5@1804,-3626 S2.5@1833,-3626
NetR100_2: R100.2 S2.8 | length 136.4
  Top Layer w8: R100.2@1696.56,-3776 S2.8@1804,-3776 S2.8@1833,-3776
NetR112_2: R112.2 U10.1 | length 97.4
  Bottom Layer w10: U10.1@1120,-520 R112.2@1217.44,-520
NetR113_1: R113.1 R114.2 R115.1 R122.2 R124.1 R130.1 U11.2 | length 1750
  Top Layer w10: R115.1@400.44,-682 400.44,-657.56 419,-639 608,-639 v1(618,-629)
  Top Layer w12: U11.2@400.44,-731.45 R115.1@400.44,-682
  Bottom Layer w10: v1(618,-629) 668,-579 744.44,-579 ; R122.2@744.44,-614 744.44,-579 ; R114.2@744.44,-542 744.44,-579 ; R130.1@1272.56,-877 1319,-877 1344,-852 1344,-516 1309,-481 1063,-481 949,-595 847,-595 831,-579 744.44,-579 ; R124.1@1272.56,-698 1344,-698 ; R113.1@1272.56,-579 1343,-579
NetR113_2: R113.2 U10.2 | length 101.2
  Bottom Layer w10: U10.2@1120,-570 1208.44,-570 R113.2@1217.44,-579
NetR114_1: R114.1 U10.15 | length 107.5
  Bottom Layer w10: R114.1@798.56,-541 836,-541 865,-570 U10.15@894,-570
NetR121_2: R121.2 U10.3 | length 105.3
  Bottom Layer w10: U10.3@1120,-620 1198.44,-620 R121.2@1217.44,-639
NetR122_1: R122.1 U10.14 | length 94.4
  Bottom Layer w10: R122.1@799.56,-620 U10.14@894,-620
NetR124_2: R124.2 U10.4 | length 109
  Bottom Layer w10: U10.4@1120,-670 1182,-670 1210,-698 R124.2@1217.44,-698
NetR125_1: R125.1 U10.13 | length 104.8
  Bottom Layer w10: R125.1@799.56,-695 825,-695 850,-670 U10.13@894,-670
NetR126_2: R126.2 U10.5 | length 112.8
  Bottom Layer w10: U10.5@1120,-720 1171,-720 1208,-757 R126.2@1217.44,-757
NetR128_2: R128.2 U10.6 | length 112.5
  Bottom Layer w10: U10.6@1120,-770 1166,-770 R128.2@1213,-817
NetR129_1: R129.1 U10.11 | length 112.2
  Bottom Layer w10: R129.1@800,-814 810,-814 854,-770 U10.11@894,-770
NetR130_2: R130.2 R134.2 U10.7 | length 176.6
  Bottom Layer w10: U10.7@1120,-820 1156,-820 R130.2@1213,-877 ; R134.2@1217.44,-937 R130.2@1217.44,-877
NetR131_1: R131.1 U10.10 | length 114
  Bottom Layer w10: R131.1@800,-874 R131.1@804,-874 ; R131.1@808,-878 866,-820 U10.10@894,-820
NetR135_1: R135.1 U12.3 | length 80
  Top Layer w10: R135.1@599.44,-1402 599.44,-1444.44 U12.3@626,-1471
NetR136_2: R136.2 U12.1 | length 73.8
  Top Layer w10: R136.2@526,-1819.56 U12.1@526,-1745.8
NetR143_2: R143.2 S2.6 | length 147.5
  Top Layer w10: R143.2@1692.56,-3659 1725,-3659 1742,-3676 S2.6@1804,-3676 S2.6@1833,-3676
NetR144_2: R144.2 S2.2 | length 286.1
  Top Layer w10: S2.2@1804,-3476 1856,-3476 1885,-3447 1885,-3304 1869,-3288 R144.2@1841.56,-3288
NetR145_2: R145.2 S2.1 | length 93.6
  Top Layer w8: S2.1@1804,-3426 1804,-3412.56 1841.56,-3375 R145.2@1841.56,-3348
NetR146_2: R146.2 S2.3 | length 130.9
  Top Layer w10: R146.2@1692.56,-3479 1714,-3479 1761,-3526 S2.3@1804,-3526
NetR147_2: R147.2 S2.4 | length 155.8
  Top Layer w10: R147.2@1692.56,-3539 1714,-3539 1751,-3576 S2.4@1804,-3576 S2.4@1833,-3576
ONOFF: J6.70
PEN: Q12.1 Q13.1 Q14.3 R86.1 | length 3732.1
  Top Layer w10: v1(794.87,-161.13) 669,-287 669,-493.44 R86.1@753,-577.44 757.44,-573 804.89,-573 Q12.1@813.26,-564.63 ; v1(1559,-242) 1559.26,-242.26 Q13.1@1559.26,-561.63 ; v1(1734,-241) 1805,-241 1891,-327 1891,-631 1821,-701 v1(1821,-951) ; Q14.3@2215.56,-1404 2332,-1287.56 2332,-1246 v1(2401,-1177)
  Bottom Layer w10: v1(794.87,-161.13) 1478.13,-161.13 v1(1559,-242) 1560,-241 v1(1734,-241) ; v1(1821,-951) 2256,-951 2401,-1096 v1(2401,-1177)
PG: J6.44
PMIC_ON_REQ: J6.76 R101.2 | length 173.9
  Top Layer w8: J6.76@2007.18,-1199.61 2007.18,-1358.18 R101.2@2018,-1369
POR_B: J6.72
RS232_RXD: J5.2 U3.8 | length 179.2
  Bottom Layer w15: J5.2@1381,-432 1455.4,-506.4 U3.8@1529.4,-506.4
RS232_TXD: J5.3 U3.7 | length 561.7
  Bottom Layer w15: J5.3@1272,-432 1329,-375 1546,-375 1602,-431 1602,-534 1579.6,-556.4 U3.7@1529.4,-556.4
SD1_CLK: C25.1 P1.5 R41.2 R54.2 | length 391.9
  Top Layer w8: R54.2@1961,-2565.56 1970.44,-2575 v2(1995,-2575)
  Bottom Layer w8: v2(1995,-2575) 2081,-2575 2102,-2596 2102,-2637 R41.2@2138.28,-2673.28 ; P1.5@2143.89,-2754.72 2143.89,-2678.89 2143.89,-2671.45 R41.2@2142,-2669.56 C25.1@2202,-2669.56
SD1_CMD: J7.76 P1.2 R40.2 | length 572.2
  Top Layer w8: v2(2007,-2537) 2007.18,-2536.82 J7.76@2007.18,-2380.72
  Bottom Layer w8: P1.2@1848.61,-2754.72 1848.61,-2672.61 1811,-2635 1811,-2560 1834,-2537 v2(2007,-2537)
SD1_DATA0: J7.70 P1.7 R42.2 | length 703.2
  Top Layer w8: v2(1912.69,-2435.31) J7.70@1912.69,-2380.72
  Bottom Layer w8: v2(1912.69,-2435.31) 1912.69,-2439.69 1932,-2459 2186,-2459 2262,-2535 2262,-2630.57 2298,-2666.57 2298,-2703 2337.98,-2742.98 P1.7@2337.98,-2759
SD1_DATA1: J7.72 P1.8 R43.2 | length 719.7
  Top Layer w8: v2(1944.19,-2435.19) J7.72@1944.19,-2380.72
  Bottom Layer w8: v2(1944.19,-2435.19) 2198.19,-2435.19 2343,-2580 2343,-2637 R43.2@2381,-2675 ; R43.2@2381,-2667.56 R43.2@2381,-2675 ; P1.8@2401.51,-2754.72 2401.51,-2710.51 2381,-2690 R43.2@2381,-2675
SD1_DATA2: J7.80 P1.9 R38.2 | length 732.3
  Top Layer w8: v2(2070.17,-2490) J7.80@2070.17,-2380.72
  Bottom Layer w8: P1.9@1651.76,-2754.72 R38.2@1651.76,-2677.24 ; R38.2@1651.76,-2669.8 R38.2@1651.76,-2677.24 ; v2(2070.17,-2490) 1767,-2490 1691,-2566 1691,-2638 R38.2@1651.76,-2677.24
SD1_DATA3: J7.78 P1.1 R39.2 | length 681
  Top Layer w8: v2(2038.68,-2514) J7.78@2038.68,-2380.72
  Bottom Layer w8: P1.1@1750.19,-2754.72 R39.2@1750.19,-2674.19 ; R39.2@1750.19,-2671.37 R39.2@1750.19,-2674.19 ; v2(2038.68,-2514) 1776,-2514 1713,-2577 1713,-2637 R39.2@1750.19,-2674.19
SHUTDOWN: J6.50
TP_INT: J3.13 J6.62 | length 2153.2
  Top Layer w8: v1@1786.71,-1500 J6.62@1786.71,-1199.61 ; v2(2335,-2090) 2335,-2147.15 2440,-2252.15 v1(2440,-2420) ; v1(2440,-2585) 2566.57,-2711.57 J3.13@2624.91,-2711.57
  Bottom Layer w8: v1(1785,-1500) 1789,-1496 2217.85,-1496 2335,-1613.15 v2(2335,-2090) ; v1(2440,-2585) v1(2440,-2420)
UART1_CTS: J6.27 P2.15 | length 1602
  Top Layer w8: v2(1251,-1097) 1251.28,-1096.72 J6.27@1251.28,-1026.39
  Bottom Layer w8: P2.15@165.35,-1846.06 215,-1796.42 215,-1724.7 320,-1619.7 320,-1469 384,-1405 903.63,-1405 1103.92,-1204.7 1151.9,-1204.7 1251,-1105.6 v2(1251,-1097)
UART1_RTS: J6.29 P1.11 R44.2 | length 2349.6
  Top Layer w8: J6.29@1282.77,-1026.39 1282.77,-1121.77 v2(1293,-1132)
  Bottom Layer w8: v2(1293,-1132) 1281,-1144 1281,-1380 1574,-1673 1574,-2766 1626,-2818 1892,-2818 1908.2,-2801.8 P1.11@1908.2,-2754.72 ; P1.11@1912,-2750.92 R44.2@1912,-2684.56 ; R44.2@1912,-2669.56 R44.2@1912,-2666
UART1_RXD: J6.31 U3.9 | length 781.7
  Top Layer w8: J6.31@1314.27,-1026.39 1314.27,-968.73 1407,-876 1517,-876 v1(1623,-770)
  Bottom Layer w8: v1(1623,-770) 1669,-724 1669,-568 1730.6,-506.4 U3.9@1755.4,-506.4
UART1_TXD: J6.33 U3.10 | length 719.2
  Top Layer w8: J6.33@1345.76,-1026.39 1345.76,-971.24 1416.5,-900.5 1528.5,-900.5 v1(1624,-805)
  Bottom Layer w8: v1(1624,-805) 1692,-737 1692,-596 1731.6,-556.4 U3.10@1755.4,-556.4
UART2_CTS: J6.19 P2.12 | length 1424.6
  Top Layer w8: v2(1125,-1097) 1125.29,-1096.71 J6.19@1125.29,-1026.39
  Bottom Layer w8: P2.12@65.35,-1646.06 116.42,-1595 190,-1595 240,-1545 240,-1431 346,-1325 870.49,-1325 1070.79,-1124.7 1090.3,-1124.7 1118,-1097 v2(1125,-1097)
UART2_RTS: J6.21 P2.11 | length 1360
  Top Layer w8: J6.21@1156.79,-1026.39 1156.79,-1096.79 v2(1157,-1097)
  Bottom Layer w8: P2.11@165.35,-1646.06 167.22,-1646.06 260,-1553.28 260,-1441 356,-1345 878.77,-1345 1079.07,-1144.7 1116.9,-1144.7 1157,-1104.6 v2(1157,-1097)
UART2_RXD: J6.23 P2.14 | length 1556.9
  Top Layer w8: v2(1188,-1097) 1188.28,-1096.72 J6.23@1188.28,-1026.39
  Bottom Layer w8: P2.14@65.35,-1746.06 116.42,-1695 189,-1695 280,-1604 280,-1451 366,-1365 887.06,-1365 1087.36,-1164.7 1128.9,-1164.7 1188,-1105.6 v2(1188,-1097)
UART2_TXD: J6.25 P2.13 | length 1487.4
  Top Layer w8: J6.25@1219.78,-1026.39 1219.78,-1096.78 v2(1220,-1097)
  Bottom Layer w8: P2.13@165.35,-1746.06 300,-1611.42 300,-1460 375,-1385 895.34,-1385 1095.64,-1184.7 1139.9,-1184.7 1220,-1104.6 v2(1220,-1097)
UART3_CTS: J6.9 P2.5 | length 980.8
  Top Layer w8: v2(967.81,-1096.81) J6.9@967.81,-1026.39
  Bottom Layer w8: P2.5@165.35,-1346.06 173.94,-1346.06 275,-1245 827.6,-1245 967.81,-1104.79 v2(967.81,-1096.81)
UART3_RTS: J6.11 P2.8 | length 1153.8
  Top Layer w8: v2(999.31,-1096.69) J6.11@999.31,-1026.39
  Bottom Layer w8: P2.8@65.35,-1446.06 116.42,-1395 189,-1395 319,-1265 839.22,-1265 999.31,-1104.91 v2(999.31,-1096.69)
UART3_RXD: J6.13 P2.7 | length 1085.2
  Top Layer w8: v2(1030.8,-1096.8) J6.13@1030.8,-1026.39
  Bottom Layer w8: P2.7@165.35,-1446.06 326.42,-1285 850.6,-1285 1030.8,-1104.79 v2(1030.8,-1096.8)
UART3_TXD: J6.15 P2.9 | length 1200
  Top Layer w8: v2(1062.3,-1096.7) J6.15@1062.3,-1026.39
  Bottom Layer w8: P2.9@165.35,-1546.06 220,-1491.42 220,-1420 335,-1305 862.2,-1305 1062.3,-1104.9 v2(1062.3,-1096.7)
UART4_RXD: J6.5 P2.3 | length 876.2
  Top Layer w8: v2(904.82,-1096.82) J6.5@904.82,-1026.39
  Bottom Layer w8: P2.3@165.35,-1246.06 205.94,-1246.06 247,-1205 804.24,-1205 904.82,-1104.42 v2(904.82,-1096.82)
UART4_TXD: J6.7 P2.6 | length 1049.8
  Top Layer w8: v2(936.32,-1096.68) J6.7@936.32,-1026.39
  Bottom Layer w8: P2.6@65.35,-1346.06 116.42,-1295 190,-1295 260,-1225 812.53,-1225 847.53,-1190 852,-1190 936.32,-1105.68 v2(936.32,-1096.68)
UART5_RXD: J6.1 P2.1 | length 782.4
  Top Layer w8: v2(841.83,-1095.83) J6.1@841.83,-1026.39
  Bottom Layer w8: P2.1@165.35,-1146.06 184.29,-1165 772.65,-1165 v2(841.83,-1095.83)
UART5_TXD: J6.3 P2.2 | length 946.4
  Top Layer w8: v2(873.32,-1096.32) J6.3@873.32,-1026.39
  Bottom Layer w8: P2.2@65.35,-1146.06 117.29,-1198 218,-1198 231,-1185 793,-1185 873.32,-1104.68 v2(873.32,-1096.32)
USB_OTG1_ID: D2.1 J6.36 R36.2 R37.2 | length 2568.2
  Top Layer w10: J6.36@1377.26,-1199.61 1377.26,-1270.26 v1(1407,-1300) ; v1(1925,-640) 2022,-543 R37.2@2022,-450.56 2008.56,-450.56 1952.85,-394.85 R36.2@1938.8,-394.85 1938.8,-309.21 D2.1@1942.01,-306
  Bottom Layer w10: v1(1407,-1300) 1413,-1306 2361,-1306 2432,-1235 2432,-1086 2268,-922 1982,-922 1926,-866 1926,-641 v1(1925,-640)
USB_OTG1_N: J6.69 R34.1 | length 176.9
  Top Layer w8: J6.69@1912.69,-1026.39 1912.69,-983 1905.94,-976.25 1905.94,-880.61 R34.1@1926,-860.56
USB_OTG1_P: J6.67 R35.1 | length 177.7
  Top Layer w8: R35.1@1866,-860.56 1887.94,-882.5 1887.94,-976.25 1881.2,-983 J6.67@1881.2,-1026.39
USB_OTG1_PWR: R29.2 R84.2 R103.1 | length 2687.6
  Top Layer w8: R84.2@730,-1720.88 737.44,-1720.88 R103.1@792.56,-1665.76 ; R103.1@800,-1665.76 915.67,-1665.76 1108.43,-1473 1546,-1473 1595,-1424 v1(1595,-1335) ; v1@2052,-863 R29.2@2052,-807
  Bottom Layer w8: v1@1601,-1332 2371,-1332 2459,-1244 2459,-1071 2285,-897 2093,-897 v1(2053,-857)
USB_OTG1_VBUS: J6.71 Q1.3 R33.1 | length 789.3
  Top Layer w15: J6.71@1944.19,-1026.39 1944.19,-921.81 1975,-891 1975,-707 2210,-472 Q1.3@2273,-472 ; R33.1@2261.56,-405 2266,-409.44 Q1.3@2266,-465
USB_OTG2_ID: J6.26 R23.2 | length 157.6
  Top Layer w8: R23.2@1219.78,-1357.22 J6.26@1219.78,-1199.61
USB_OTG2_N: J6.57 R27.1 | length 177.3
  Top Layer w8: R27.1@1709.6,-860.56 1730.46,-881.43 1730.46,-976.25 1723.72,-983 J6.57@1723.72,-1026.39
USB_OTG2_P: J6.59 R28.1 | length 177.4
  Top Layer w8: J6.59@1755.21,-1026.39 1755.21,-983 1748.46,-976.25 1748.46,-881.69 R28.1@1769.6,-860.56
USB_OTG2_VBUS: J6.61 R24.2 | length 911.1
  Top Layer w15: J6.61@1786.71,-1026.39 1786.71,-1081.71 1835,-1130 2095,-1130 2247.44,-977.56 2247.44,-925 2342.44,-830 R24.2@2467.44,-830
USBD_N: J2.2 R27.2 | length 973.1
  Top Layer w8: R27.2@1709.6,-805.44 1730.6,-784.44 1730.6,-691.95 1730.6,-654.95 1794.54,-591 1847,-591 v1(1855,-583)
  Bottom Layer w8: v1(1855,-583) 1855,-589 1857,-591 2464,-591 J2.2@2495,-560
USBD_P: J2.3 R28.2 | length 943.2
  Top Layer w8: R28.2@1769.6,-805.44 1748.6,-784.44 1748.6,-662.4 1802,-609 1847,-609 v1(1855,-617)
  Bottom Layer w8: v1(1855,-617) 1855,-611 1857,-609 2464,-609 J2.3@2495,-640
VDD_3V3: C50.1 C51.1 Q13.2 R87.1 U7.2 U7.4 | length 631.3
  Top Layer w30: U7.2@1157.89,-730.06 1200.06,-730.06 1271,-801 1329,-801 U7.4@1386.24,-743.76
  Top Layer w40: U7.4@1386.24,-730.06 U7.4@1412,-704.3 ; U7.4@1412,-718 U7.4@1412,-704.3 ; C51.1@1412,-626.56 U7.4@1412,-704.3 ; Q13.2@1559.26,-640.37 1559.26,-691.82 1552.08,-699 1512.88,-699 C50.1@1491,-677.12 1476.12,-692 1424.3,-692 U7.4@1412,-704.3
VDD_5V: C29.1 C47.1 C49.2 J6.77 J6.79 Q12.2 Q15.3 R85.2 R86.2 R110.1 U7.3 | length 2257.8
  Top Layer w20: R86.2@753,-632.56 775,-654.56
  Top Layer w40: 1007.12,-855 1007.12,-872.12 v4(1049,-914) ; C47.1@1059,-803.12 1076.5,-820.61 U7.3@1157.89,-820.61 ; 2056,-1045 C29.1@2056,-931 ; 2056,-1027 v4(2110,-1027)
  Top Layer w50: Q15.3@672,-751 672,-855 R110.1@675,-855 1007.12,-855 C47.1@1059,-803.12 ; 775,-850 R85.2@775,-720 775,-681.63 Q12.2@813.26,-643.37
  Bottom Layer w40: v4(1049,-914) 1049,-971 1105,-1027 v4(2110,-1027)
VIN: P4.2 P4.5 P7.1 R95.2 | length 965.9
  Bottom Layer w70: P4.2@77.99,-757.68 166,-757.68 ; R95.2@82,-327 82,-515 166,-599 166,-757.68 ; P7.1@445,-570 445,-665 352.32,-757.68 P4.5@286.65,-757.68 166,-757.68
VRTC: J6.73 R9.1 | length 762.9
  Top Layer w12: J6.73@1975.68,-1026.39 1975.68,-1080.68 v1(1995,-1100) ; R9.1@2370,-1386.56 v2(2370,-1253)
  Bottom Layer w12: v1(1995,-1100) 2122.74,-1100 2155.74,-1067 2324,-1067 2370,-1113 v2(2370,-1253)
VRTC': C8.1 D1.3 R9.2 U1.8 | length 1277.2
  Top Layer w12: C8.1@1401.56,-1737 1689,-1737 v1(1820,-1606) ; v2(2074,-1606) 2224,-1606 2314.44,-1515.56 R9.2@2314.44,-1387
  Top Layer w20: U1.8@1315.17,-1737 C8.1@1401.56,-1737 ; U1.8@1325,-1727.17 D1.3@1325,-1669.56
  Bottom Layer w12: v1(1820,-1606) 1937,-1606 v2(2074,-1606)
pads on no net: BT1.3 BT1.4 J1.7 J1.8 J1.16 J3.9 J3.10 J3.11 J3.12 J4.10 J5.1 J5.4 J5.6 J5.7 J5.8 J5.9 J6.38 J6.51 J6.53 J6.65 J6.78 J6.81 J6.82 J7.11 J7.81 J7.82 M1.0 M2.0 M3.0 M4.0 M5.0 M6.0 P1.10 P1.14 P1.15 P4.1 P4.4 U1.1 U1.2 U2.8 U2.19 U2.22 U2.26 U2.27 U3.11 U3.12 U3.13 U3.14

## Polygon pours and split planes (outlines as drawn)
GND on Top Layer "a" (hatched 90Degree grid 8 track 8, remove dead copper, pour order 2): -314,224 -314,-1057 -314,-4204 -309,-4209 3296,-4209 3296,197 3318,219
GND on Bottom Layer "a" (hatched 90Degree grid 8 track 8, remove dead copper, pour order 3): -313,223 -313,-1058 -313,-4205 -308,-4210 3297,-4210 3297,196 3319,218

## Keep-outs
Keep-Out Layer:
  lines w10: -0.3,-3799.21 ccw(c137.5,-3799.21) 137,-3937 2736.22,-3937.01 ccw(c2736.22,-3799.21) 2874.02,-3799.71 ; 0,-3799 0,-137.3 cw(c137.79,-137.8) 137.79,0 2736.72,0 ; 2736.72,-0.21 cw(c2736.22,-138) 2874.02,-138 2874.02,-3800

## Silkscreen, mask and mechanical layers (free items; w line width, h text height)
Top Overlay:
  lines w7.87: 136.8,-137.8 137.8,-137.8 ; 485,-720 485,-625 495,-615
  lines w10: 1835,-1812 1980,-1812 1980,-1852 2042,-1790 1980,-1728 1980,-1768 1835,-1768 1835,-1812
  lines w11.81: 471.75,-2431.9 ccw(c530.8,-2431.9) 530.8,-2490.95 2381.2,-2490.95 ccw(c2381.2,-2431.9) 2440.25,-2431.9 2440.25,-975.2 ccw(c2381.2,-975.2) 2381.2,-916.15 530.8,-916.15 ccw(c530.8,-975.2) 471.75,-975.2 471.75,-2431.9
  text "OKMX6UL-C2 V1.0" at 1580,-3050 h60
  text "20161029" at 1774,-3150 h25
Bottom Overlay:
  text "OKMX6UL-C2 V1.0" at 1900,-1795 h60
  text "20160930" at 1875,-1880 h25

## Text inside footprints (layer, text, board x,y; h text height)
J3: Top Overlay "50" at 2535,-3380 h30 r270; Top Overlay "45" at 2535,-3280 h30 r270; Top Overlay "40" at 2535,-3180 h30 r270; Top Overlay "35" at 2535,-3085 h30 r270; Top Overlay "30" at 2535,-2985 h30 r270; Top Overlay "25" at 2535,-2885 h30 r270; Top Overlay "20" at 2535,-2790 h30 r270; Top Overlay "15" at 2535,-2695 h30 r270; Top Overlay "10" at 2535,-2595 h30 r270; Top Overlay "5" at 2535,-2525 h30 r270
P2: Bottom Overlay "24" at 89.29,-2309.61 h50 r90; Bottom Overlay "23" at 189.29,-2309.61 h50 r90; Bottom Overlay "2" at 89.29,-1049.61 h50 r90; Bottom Overlay "1" at 189.29,-1049.61 h50 r90
P3: Bottom Overlay "24" at 2727.09,-2309.61 h50 r90; Bottom Overlay "23" at 2827.09,-2309.61 h50 r90; Bottom Overlay "2" at 2727.09,-1049.61 h50 r90; Bottom Overlay "1" at 2827.09,-1049.61 h50 r90